# Altium PCB 辉光钟第二版.PcbDoc
Units mil, origin at the board's own origin, x right, y up, seen from the top; angles counter-clockwise.
Board outline 7543.7 x 2468.7 mil, 2 copper layers (Top Layer, Bottom Layer); 50 components, 122 nets, 373 pads, 139 vias.
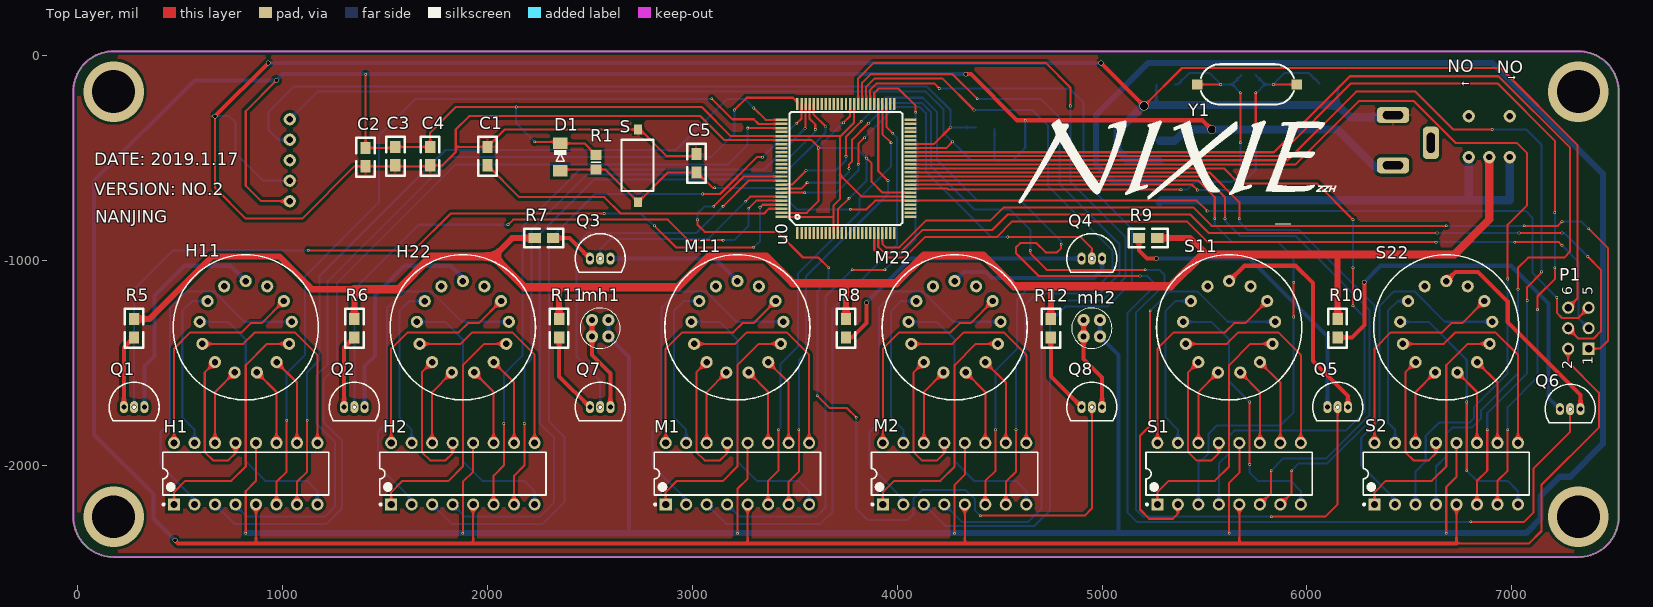
[diagram p0: Top Layer view]
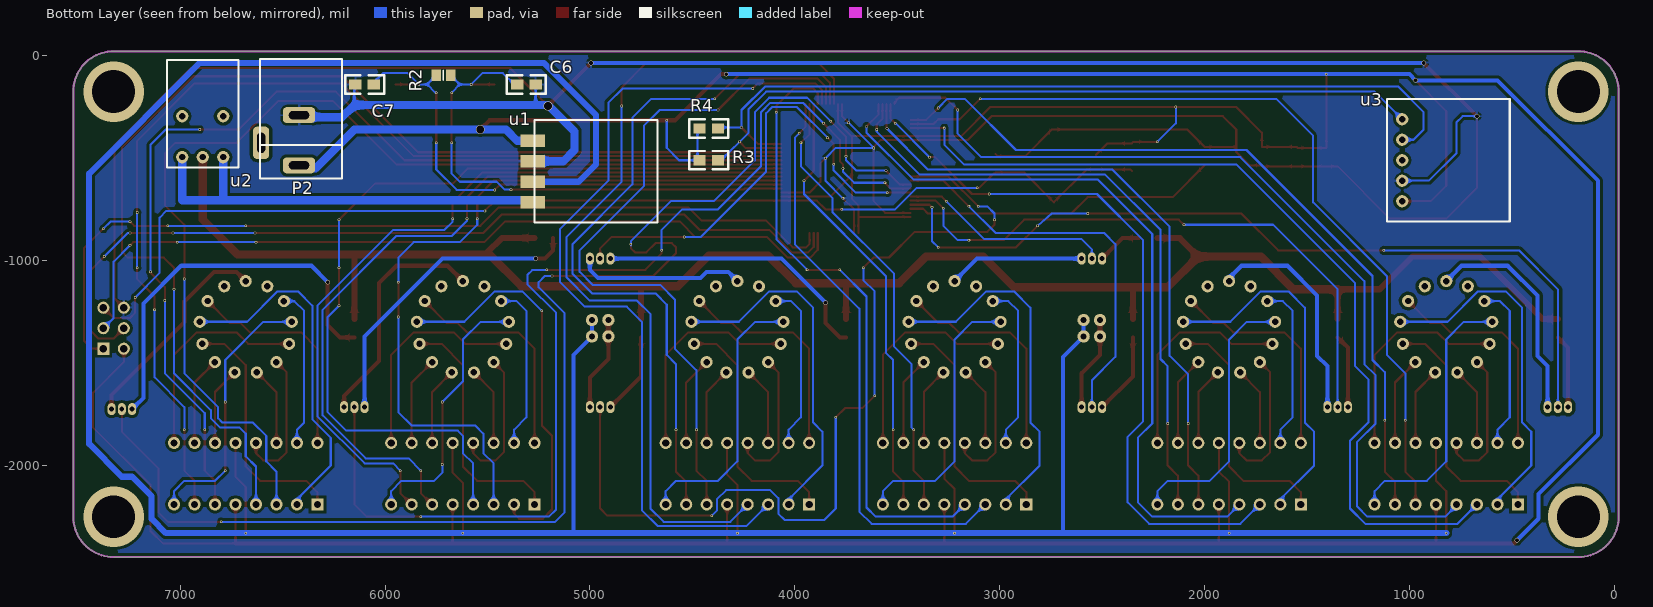
[diagram p1: Bottom Layer view, seen from below]

## Layer stack, top to bottom
Top Solder: solder mask 0.4, Solder Resist, Dk 3.5
Top Layer: signal copper 1.4
Dielectric 1: dielectric 12.6, FR-4, Dk 4.8
Bottom Layer: signal copper 1.4
Bottom Solder: solder mask 0.4, Solder Resist, Dk 3.5

## Board outline
175,-2446.85 cw(c175,-2250) -21.85,-2250 -21.85,-175 cw(c175,-175) 175,21.85 7325,21.85 cw(c7325,-175) 7521.85,-175 7521.85,-2250 cw(c7325,-2250) 7325,-2446.85

## Design rules (kind name [scope] priority, off if disabled: settings)
Clearance [inpolygon] p1: gap=15
PolygonConnect [All] p1: connectstyle=Relief reliefconductorwidth=10 reliefentries=4 polygonreliefangle="90 Angle" airgapwidth=10
RoutingVias [All] p1: holewidth=28 width=20 viastyle="Through Hole" minholewidth=10 minwidth=10 maxholewidth=28 maxwidth=50
SolderMaskExpansion [All] p1: expansion=4
UnpouredPolygon [All] p1: allowunpoured=FALSE
Width [All] p1: maxlimit=40 minlimit=10 preferedwidth=10
29 further rules are at their usual default settings.

## Components (designator, comment, footprint, x,y, rotation, side; value= is the part's Value field where it differs from the comment)
C1 "100nf" 0805#1 2000,-445 r270 top
C2 "100nf" 0805#1 1405,-540 r90 top
C3 "100nf" 0805#1 1550,-535 r90 top
C4 "100nf" 0805#1 1720,-535 r90 top
C5 "22p" 0805#1 3020,-480 r270 top
C6 "18p" 0805#1 5265,-140 r0 bottom
C7 "18p" 0805#1 6145,-140 r180 bottom
D1 "CD1206-S01575" MINIMELF 2355,-495 r270 top
H1 "K155ID1" DIP-16 820,-2040 r90 top
H2 "K155ID1" DIP-16 1880,-2040 r90 top
H11 "IN-14" IN-14 820,-1325 r0 top
H22 "IN-14" IN-14 1880,-1325 r0 top
M1 "K155ID1" DIP-16 3220,-2040 r90 top
M2 "K155ID1" DIP-16 4280,-2040 r90 top
M11 "IN-14" IN-14 3220,-1325 r0 top
M22 "IN-14" IN-14 4280,-1325 r0 top
mh1 "maohao" PCBComponent_1#1 2550,-1330 r0 top
mh2 "maohao" PCBComponent_1#1 4950,-1330 r0 top
P1 "ISCP" HDR2X3 7375,-1430 r90 top
P2 "电源" DC5.5-2.1 6420,-290 r270 bottom
Q1 "NPN三极管" TO-92 275,-1715 r180 top
Q2 "NPN三极管" TO-92 1350,-1715 r180 top
Q3 "NPN三极管" TO-92 2550,-990 r180 top
Q4 "NPN三极管" TO-92 4950,-990 r180 top
Q5 "NPN三极管" TO-92 6150,-1715 r180 top
Q6 "NPN三极管" TO-92 7285,-1725 r180 top
Q7 "NPN三极管" TO-92 2550,-1715 r180 top
Q8 "NPN三极管" TO-92 4950,-1715 r180 top
R1 "10K" 0805#2 2530,-520 r90 top
R2 "1M" 0805#2 5715,-95 r180 bottom
R3 "10K" 0805#1 4375,-510 r0 bottom
R4 "10K" 0805#1 4375,-355 r0 bottom
R5 "20K" 0805#1 275,-1285 r270 top
R6 "20K" 0805#1 1350,-1285 r270 top
R7 "20K" 0805#1 2230,-890 r0 top
R8 "20K" 0805#1 3750,-1285 r270 top
R9 "20K" 0805#1 5270,-890 r180 top
R10 "20K" 0805#1 6150,-1285 r270 top
R11 "200K" 0805#1 2350,-1285 r270 top
R12 "200K" 0805#1 4750,-1285 r270 top
S "SWITCH" SWITCH 2735,-360 r270 top
S1 "K155ID1" DIP-16 5620,-2040 r90 top
S2 "K155ID1" DIP-16 6680,-2040 r90 top
S11 "IN-14" IN-14 5620,-1325 r0 top
S22 "IN-14" IN-14 6680,-1325 r0 top
u0 "ATMEGA2560-16AU" TQFP100 3750,-550 r90 top
u1 "5V-160V升压模块" PCBComponent_1#2 4670,-315 r90 bottom
u2 "kaiguan" PCBComponent_1#3 6890,-395 r0 bottom
u3 "clock" PCBComponent_1#4 810,-485 r180 bottom
Y1 "16MHz" XTAL_US 5805,-140 r180 top

## Footprints (in the part's own frame and the unit in brackets; to place one, negate y for a bottom-side part, rotate by r counter-clockwise, add the part's x,y. Pads: shape width x height; smd on the part's side, far side on the other; paste and mask are expansions set on the pad)
0805#1 [mil]
  rect 60x50 smd: 1(0,-0.06) 2(90,-0.06)
  silkscreen extent -50,-45 140,45
0805#2 [mil]
  rect 47.24x55.12 smd: 1(-35.43,0) 2(35.43,0)
  silkscreen extent 0,-24 0,24, body extent -42,-28 42,28, height 28
DC5.5-2.1 [mm]
  rrect50% 2x4 hole 1 slot 2.5 at 90 deg: 1(0,0) 3(6.223,0)
  rrect50% 4x2 hole 1 slot 2.5 at 0 deg: 2(3.429,-4.699)
DIP-16 [mm] "DIP; 16 Leads; Row Spacing 7.62 mm; Pitch 2.54 mm"
  rect 1.5x1.5 hole 0.9: 1(-3.81,8.89)
  round 1.5 hole 0.9: 2(-3.81,6.35) 3(-3.81,3.81) 4(-3.81,1.27) 5(-3.81,-1.27) 6(-3.81,-3.81) 7(-3.81,-6.35) 8(-3.81,-8.89) 9(3.81,-8.89) 10(3.81,-6.35) 11(3.81,-3.81) 12(3.81,-1.27) 13(3.81,1.27) 14(3.81,3.81) 15(3.81,6.35) 16(3.81,8.89)
  silkscreen extent -3.93,-10.3 2.65,10.31, body extent -3.6,-10.28 3.6,10.28, height 5.08
HDR2X3 [mm] "Connector; Header; 3x2 Position"
  rect 1.5x1.5 hole 0.9: 1(0,0)
  round 1.5 hole 0.9: 2(0,2.54) 3(2.54,0) 4(2.54,2.54) 5(5.08,0) 6(5.08,2.54)
IN-14 [mm]
  round 1.5 hole 0.8: 0(4.727,3.248) 1(-4.733,3.239) 2(-5.708,0.665) 3(-5.375,-2.068) 4(-3.81,-4.332) 5(-1.372,-5.61) 6(1.381,-5.607) 7(3.818,-4.326) 8(5.379,-2.058) 9(5.707,0.675) 11(0,5.724) L0(2.664,5.07) R0(-2.673,5.065)
  silkscreen extent -9,-9.03 9,8.97
MINIMELF [mil]
  rect 56x71 smd: A(67,0) C(-66.93,0)
  silkscreen extent -34,-31 20,31
PCBComponent_1#1 [mil]
  round 60 hole 30: 1(-40,40) 2(40,40) 3(-40,-40) 4(40,-40)
  silkscreen extent -98,-98 98,98
PCBComponent_1#2 [mil]
  rect 62.99x120 smd: 1(-100,610) 2(-200,610) 3(-300,610) 4(-400,610)
  silkscreen extent -500,0 3,600
PCBComponent_1#3 [mil]
  round 60 hole 30: 1(-100,100) 2(0,100) 3(100,100) 4(-100,-100) 5(100,-100)
  silkscreen extent -175,-375 175,150
PCBComponent_1#4 [mil]
  round 60 hole 30: 1(-225,-225) 2(-225,-125) 3(-225,-25) 4(-225,75) 5(-225,175)
  silkscreen extent -300,-325 300,275
SWITCH [mm]
  rect 1.2x1 smd: 1(0,0) 2(9.017,0)
  silkscreen extent 1.27,-2.03 7.62,1.91
TO-92 [mm]
  oval 1x1.5 hole 0.6: 1(1.27,0) 2(0,0) 3(-1.27,0)
  silkscreen extent -3.1,-3.1 3.1,1.7, body extent -3.08,-3.13 3.12,1.68, height 10.31
TQFP100 [mil]
  rect 60x12 smd: 1(-314.96,237) 2(-314.96,217) 3(-314.96,197) 4(-314.96,178) 5(-314.96,158) 6(-314.96,138) 7(-314.96,119) 8(-314.96,99) 9(-314.96,79) 10(-314.96,60) 11(-314.96,40) 12(-314.96,20) 13(-314.96,0) 14(-314.96,-19.69) 15(-314.96,-39.37) 16(-314.96,-59.06) 17(-314.96,-78.74) 18(-314.96,-98.43) 19(-314.96,-118.11) 20(-314.96,-137.8) 21(-314.96,-157.48) 22(-314.96,-177.17) 23(-314.96,-196.85) 24(-314.96,-216.54) 25(-314.96,-236.22) 51(315,-236.22) 52(315,-216.54) 53(315,-196.85) 54(315,-177.17) 55(315,-157.48) 56(315,-137.8) 57(315,-118.11) 58(315,-98.43) 59(315,-78.74) 60(315,-59.06) 61(315,-39.37) 62(315,-19.69) 63(315,0) 64(315,20) 65(315,40) 66(315,60) 67(315,79) 68(315,99) 69(315,119) 70(315,138) 71(315,158) 72(315,178) 73(315,197) 74(315,217) 75(315,237)
  rect 12x60 smd: 26(-236.22,-314.96) 27(-216.54,-314.96) 28(-196.85,-314.96) 29(-177.17,-314.96) 30(-157.48,-314.96) 31(-137.8,-314.96) 32(-118.11,-314.96) 33(-98.43,-314.96) 34(-78.74,-314.96) 35(-59.06,-314.96) 36(-39.37,-314.96) 37(-19.68,-314.96) 38(0,-314.96) 39(20,-314.96) 40(40,-314.96) 41(60,-314.96) 42(79,-314.96) 43(99,-314.96) 44(119,-314.96) 45(138,-314.96) 46(158,-314.96) 47(178,-314.96) 48(197,-314.96) 49(217,-314.96) 50(237,-314.96) 76(237,315) 77(217,315) 78(197,315) 79(178,315) 80(158,315) 81(138,315) 82(119,315) 83(99,315) 84(79,315) 85(60,315) 86(40,315) 87(20,315) 88(0,315) 89(-19.68,315) 90(-39.37,315) 91(-59.06,315) 92(-78.74,315) 93(-98.43,315) 94(-118.11,315) 95(-137.8,315) 96(-157.48,315) 97(-177.17,315) 98(-196.85,315) 99(-216.54,315) 100(-236.22,315)
  silkscreen extent -276,-276 276,276
XTAL_US [mil]
  rect 50x50 smd: 1(-145,0) 2(340,0)
  silkscreen extent -131,-98 323,98

## Part data
C1 C2 C3 C4: library part C
C5: library part C_3
C6 C7: library part C_1
D1: library part DIODE-MINIMELF, "<b>DIODE</b>"
P1: library part "Header 3X2", "Header, 3-Pin, Dual row"
P2: library part dc5.5-2.1
Q1 Q2 Q3 Q4 Q5 Q6 Q7 Q8: library part NPN三极管_1, "NPN"
R1 R2: library part RES
R3 R4 R5 R6 R7 R8 R9 R10 R11 R12: library part R
u0: library part ATMEGA2560AU, "<b>MICROCONTROLLER</b><p> / 64/128/256 Kbytes FLASH<p> / 4 Kbytes EEPROM<p> / 8 Kbytes SRAM<p> / 86 General Purpose I/O pins<p> / 12-channels16-bit PWM<p> / 4 x Serial USARTs<p> / 16-channels 10-bit A/D<p>"
u1: library part 5-160
Y1: library part XTAL, "Crystal Oscillator"

## Via types
v1: diameter 13, hole 8, Top Layer to Bottom Layer, 124 vias
v2: diameter 23, hole 18, Top Layer to Bottom Layer, 9 vias
v3: diameter 295.28, hole 208.66, Top Layer to Bottom Layer, 4 vias
v4: diameter 43, hole 38, Top Layer to Bottom Layer, 2 vias

## Nets (pads, with @x,y where several pads share a name; then routed paths per layer and width w, separated by ;. In a path a pad name is that pad's centre, name@x,y a point inside that pad or via, vN(x,y) a via of type N, cw(c..) or ccw(c..) an arc to the next point about the centre after c; other vN are vias at no path point)
160V: u1.4 u2.1 u2.3 | length 2109.1
  Bottom Layer w40: u1.4 5290,-705 6790,-705 ; u2.1@6790,-520 6790,-705 ; u2.3 6990,-705 6790,-705
AREF: C1.2 u0.98 | length 1542
  Top Layer w10: C1.2 2154.94,-690 2570,-690 2650,-770 3350,-770 3373.15,-746.85 u0.98
GND: C1.1 C2.1 C3.1 C4.1 C5.1 C6.1 C7.1 P1.6 P2.1 S.1 u0.11 u0.32 u0.62 u0.81 u0.99 u1.2 u3.2 | length 17059.6
  Top Layer w10: v2(670,-295) 670,-645 820,-795 1095,-795 1350,-540 C2.1 C4.1@1715.07,-540 ; C4.1 1780,-535 1845,-470 1845,-360 1910,-295 3040,-295 3157,-412 u0.81 3582,-412 3615,-445 3615,-710 3558.46,-766.54 u0.99 ; 1845,-445 C1.1 2084.94,-360 S.1 2745,-360 2875,-490 3009.94,-490 C5.1 ; u0.11 3710,-750 v1(3765,-695) ; v1(3737.5,-327.5) 3769.69,-295.32 u0.62 ; v1(3850,-500) 3875,-525 3875,-615 3928.11,-668.11 u0.32 ; v4(5205,-245) 5390,-60 6945,-60 7320,-435 7320,-1185 P1.6
  Top Layer w20: v2(670,-295) v2(930,-35) ; v2(4995,-35) v4(5205,-245)
  Bottom Layer w10: v2(670,-295) 740,-295 770,-325 770,-475 905,-610 u3.2 ; v1(3737.5,-327.5) v1(3615,-450) 3800,-450 v1(3850,-500) 3850,-610 v1(3765,-695) ; 5260,-240 5265,-240 C6.1 ; 6150,-240 6150,-155.06 C7.1@6160,-145.06
  Bottom Layer w20: v2(930,-35) v2(4995,-35)
  Bottom Layer w40: 5260,-240 5205,-240 5075,-370 5075,-460 5130,-515 u1.2 ; 5265,-240 6150,-240 6210,-300 P2.1@6350,-300
GNDH: H1.12 H2.12 M1.12 M2.12 mh1.2 mh1.4 mh2.2 mh2.4 S1.12 S2.12 u1.3 | length 16509.2
  Top Layer w10: v1(820,-2330) 820,-2125 870,-2075 H1.12 ; v1(1880,-2330) 1880,-2080 1930,-2030 H2.12 ; v1(3220,-2330) 3220,-2115 3270,-2065 M1.12 ; v1(4280,-2330) 4280,-2095 4330,-2045 M2.12 ; v1(5620,-2330) 5620,-2085 5670,-2035 S1.12 ; v1(6680,-2330) 6680,-2105 6730,-2055 S2.12
  Bottom Layer w10: 6155,-35 6160,-40
  Bottom Layer w20: mh1.2 mh1.4 2690,-1470 2690,-2330 ; mh2.2 mh2.4 5080,-1460 5080,-2330
  Bottom Layer w30: v1(820,-2330) 7070,-2330 7140,-2260 7140,-2150 7235,-2055 7285,-2055 7445,-1895 7445,-575 6905,-35 6155,-35 5225,-35 4970,-290 4970,-530 5055,-615 u1.3
H1-0: H1.16 H11.0 | length 1092.6
  Top Layer w10: H1.16 470,-1430 550,-1350 800,-1350 845,-1305 898.26,-1305 H11.0
H1-1: H1.15 H11.1 | length 813.2
  Bottom Layer w10: H1.15 570,-1825 510,-1765 510,-1245 557.53,-1197.47 H11.1
H1-2: H1.8 H11.2 | length 1330.5
  Bottom Layer w10: H11.2 733.82,-1298.82 820,-1385 820,-1980 915,-2075 1120,-2075 1170,-2125 H1.8
H1-3: H1.9 H11.3 | length 1060.5
  Top Layer w10: H11.3 808.59,-1406.41 865,-1350 1060,-1350 1170,-1460 H1.9
H1-4: H1.13 H11.4 | length 691.2
  Top Layer w10: H11.4 620,-1545.56 620,-1935 660,-1975 735,-1975 770,-1940 H1.13
H1-5: H1.14 H11.5 | length 383.9
  Top Layer w10: H1.14 670,-1641.86 H11.5
H1-6: H1.11 H11.6 | length 383.8
  Top Layer w10: H11.6 970,-1641.38 H1.11
H1-7: H1.10 H11.7 | length 436
  Top Layer w10: H11.7 1070,-1595 H1.10
H1-8: H1.1 H11.8 | length 1211.6
  Top Layer w10: H1.1 470,-2130 525,-2075 750,-2075 820,-2005 820,-1510 923.97,-1406.04 H11.8
H1-9: H1.2 H11.9 | length 1736.3
  Bottom Layer w10: H1.2 570,-2165 405,-2000 405,-1835 450,-1790 450,-1230 530,-1150 665,-1150 813.43,-1298.43 H11.9
H1-A: H1.3 u0.78 | length 4386.2
  Top Layer w10: v1(3270,-353) u0.78
  Bottom Layer w10: H1.3 765,-2285 1215,-2285 1290,-2210 1290,-1880 1200,-1790 1200,-1580 1265,-1515 1265,-1110 1845,-530 3175,-530 3270,-435 v1(3270,-353)
H1-B: H1.6 u0.77 | length 4097.6
  Top Layer w10: H1.6 970,-2080 1020,-2030 v1(1020,-1780) ; v1(3095,-210) 3195,-310 3300,-310 3323,-333 u0.77
  Bottom Layer w10: v1(1020,-1780) 1020,-1550 1110,-1460 1110,-1075 1470,-715 1470,-390 1650,-210 v1(3095,-210)
H1-C: H1.7 u0.76 | length 3816.5
  Top Layer w10: H1.7 1070,-2080 1120,-2030 v1(1120,-1780) ; v1(3300,-255) 3358,-313 u0.76
  Bottom Layer w10: v1(1120,-1780) 1120,-1545 1180,-1485 1180,-1075 1795,-460 2920,-460 3170,-210 3255,-210 v1(3300,-255)
H1-D: H1.4 u0.75 | length 4441.8
  Top Layer w10: v1(3205,-265) 3265,-205 3491,-205 3513,-227 u0.75
  Bottom Layer w10: H1.4 770,-2195 825,-2250 1205,-2250 1255,-2200 1255,-1885 1165,-1795 1165,-1560 1220,-1505 1220,-1100 1825,-495 3090,-495 3205,-380 v1(3205,-265)
H2-0: H2.16 H22.0 | length 1092.6
  Top Layer w10: H2.16 1530,-1430 1610,-1350 1860,-1350 1905,-1305 1958.26,-1305 H22.0
H2-1: H2.15 H22.1 | length 813.2
  Bottom Layer w10: H2.15 1630,-1825 1570,-1765 1570,-1245 1617.53,-1197.47 H22.1
H2-2: H2.8 H22.2 | length 1330.5
  Bottom Layer w10: H22.2 1793.82,-1298.82 1880,-1385 1880,-1980 1975,-2075 2180,-2075 2230,-2125 H2.8
H2-3: H2.9 H22.3 | length 1060.5
  Top Layer w10: H22.3 1868.6,-1406.41 1925,-1350 2120,-1350 2230,-1460 H2.9
H2-4: H2.13 H22.4 | length 691.2
  Top Layer w10: H22.4 1680,-1545.56 1680,-1935 1720,-1975 1795,-1975 1830,-1940 H2.13
H2-5: H2.14 H22.5 | length 383.9
  Top Layer w10: H2.14 1730,-1641.86 H22.5
H2-6: H2.11 H22.6 | length 383.8
  Top Layer w10: H22.6 2030,-1641.38 H2.11
H2-7: H2.10 H22.7 | length 436
  Top Layer w10: H22.7 2130,-1595 H2.10
H2-8: H2.1 H22.8 | length 1211.6
  Top Layer w10: H2.1 1530,-2130 1585,-2075 1810,-2075 1880,-2005 1880,-1510 1983.97,-1406.04 H22.8
H2-9: H2.2 H22.9 | length 1711.3
  Bottom Layer w10: H2.2@1630,-2165 1465,-2000 1465,-1835 1510,-1790 1510,-1230 1590,-1150 1725,-1150 1873.43,-1298.43 H22.9
H2-A: H2.3 u0.74 | length 3589.5
  Top Layer w10: v1(3050,-675) 3135,-675 3315,-495 v1(3342.5,-495) ; v1(3510,-330) 3533,-307 u0.74
  Bottom Layer w10: H2.3 1825,-2285 2270,-2285 2375,-2180 2375,-1860 2300,-1785 2300,-900 2525,-675 v1(3050,-675) ; v1(3342.5,-495) 3507.5,-330 v1(3510,-330)
H2-B: H2.6 u0.73 | length 3108.8
  Top Layer w10: H2.6 2030,-2050 2080,-2000 v1(2080,-1795) ; v1@3553,-352 u0.73
  Bottom Layer w10: v1(2080,-1795) 2080,-1555 2170,-1465 2170,-835 2450,-555 3350,-555 v1(3550,-355)
H2-C: H2.7 u0.72 | length 3105.6
  Top Layer w10: H2.7 2130,-2050 2180,-2000 v1(2180,-1795) ; u0.72 3572,-307 3600,-335 v1(3600,-360)
  Bottom Layer w10: v1(2180,-1795) 2180,-1515 2215,-1480 2215,-850 2485,-580 3390,-580 3600,-370 v1(3600,-360)
H2-D: H2.4 u0.71 | length 3651.9
  Top Layer w10: u0.71 3592,-287 v1(3650,-345)
  Bottom Layer w10: H2.4 1890,-2250 2255,-2250 2325,-2180 2325,-1865 2255,-1795 2255,-870 2520,-605 3420,-605 3650,-375 v1(3650,-345)
KH1: Q1.2 u0.97 | length 4136.7
  Top Layer w10: v1(1125,-950) 1640,-950 1820,-770 v1(2570,-770) ; v1(2815,-830) 2920,-935 v1(3300,-935) ; v1(3330,-740) 3342.83,-727.17 u0.97
  Bottom Layer w10: Q1.2 275,-1140 465,-950 v1(1125,-950) ; v1(2570,-770) 2745,-770 v1(2815,-830) ; v1(3300,-935) 3330,-905 v1(3330,-740)
KH2: Q2.2 u0.96 | length 2971.8
  Top Layer w10: v1(2100,-825) 2125,-800 2880,-800 2980,-900 v1(3150,-900) ; v1(3275,-745) 3312.52,-707.48 u0.96
  Bottom Layer w10: Q2.2 1350,-1140 1665,-825 v1(2100,-825) ; v1(3150,-900) 3205,-900 3275,-830 v1(3275,-745)
KM1: Q3.2 u0.95 | length 1036.5
  Top Layer w10: v1(3260,-710) 3282.2,-687.8 u0.95
  Bottom Layer w10: Q3.2 2550,-945 2600,-895 3075,-895 v1(3260,-710)
KM2: Q4.2 u0.94 | length 2267.1
  Top Layer w10: u0.94 v1(3548.11,-668.11) ; v1(3810,-530) 3810,-430 v1(3840,-400) ; v1(4540,-885) 4895,-885 4950,-940 Q4.2
  Bottom Layer w10: v1(3548.11,-668.11) 3701.89,-668.11 3810,-560 v1(3810,-530) ; v1(3840,-400) 3990,-250 4110,-250 4140,-280 4140,-565 4460,-885 v1(4540,-885)
KMH1: Q7.2 u0.91 | length 1971.4
  Top Layer w10: v1(3150,-735) 3275.94,-609.06 u0.91
  Bottom Layer w10: Q7.2 2550,-1585 2435,-1470 2435,-920 2490,-865 3020,-865 v1(3150,-735)
KMH2: Q8.2 u0.90 | length 4463.3
  Top Layer w10: v1(3025,-800) 3025,-825 3060,-860 3415,-860 3540,-985 3615,-985 v1(3665,-1035) ; v1(3105,-735) 3250.63,-589.37 u0.90 ; v1(3610,-1660) 3670,-1720 3755,-1720 v1(3800,-1765) ; v1(4405,-2245) 4915,-2245 4950,-2210 Q8.2
  Bottom Layer w10: v1(3025,-800) 3025,-770 3060,-735 v1(3105,-735) ; v1(3610,-1660) 3610,-1150 3665,-1095 v1(3665,-1035) ; v1(3800,-1765) 3800,-2210 3855,-2265 4050,-2265 4080,-2235 4080,-2160 4120,-2120 4335,-2120 4380,-2165 4380,-2220 v1(4405,-2245)
KS1: Q5.2 u0.93 | length 5395.8
  Top Layer w10: u0.93 3531.57,-648.43 v1(3560,-620) ; v1(3765,-550) 3765,-530 3780,-515 3780,-410 v1(3860,-330) ; v1(4650,-950) 4650,-965 4730,-1045 v1(5210,-1045) ; v1(5825,-2250) 6090,-2250 6150,-2190 Q5.2
  Bottom Layer w10: v1(3560,-620) 3710,-620 3765,-565 v1(3765,-550) ; v1(3860,-330) 3960,-230 4120,-230 4165,-275 4165,-540 4375,-750 4550,-750 4650,-850 v1(4650,-950) ; v1(5210,-1045) 5280,-1045 ; 5281.67,-1046.67 5305,-1070 5305,-1115 5165,-1255 5165,-2215 5200,-2250 v1(5825,-2250)
KS2: Q6.2 u0.92 | length 6862.3
  Top Layer w10: u0.92 3486.26,-628.74 v1(3555,-560) ; v1(3750,-490) 3750,-395 v1(3825,-320) ; v1(4800,-920) 4800,-940 4780,-960 4725,-960 4680,-915 4600,-915 4580,-935 4580,-965 4690,-1075 v1(5185,-1075) ; v1(6800,-2275) 7060,-2275 7105,-2230 7105,-2015 7285,-1835 Q6.2
  Bottom Layer w10: v1(3555,-560) 3700,-560 3750,-510 v1(3750,-490) ; v1(3825,-320) 3940,-205 4125,-205 4195,-275 4195,-510 4395,-710 4605,-710 4800,-905 v1@4800,-925 ; v1(5185,-1075) 5220,-1075 5250,-1105 5250,-1130 5125,-1255 5125,-2230 5170,-2275 v1(6800,-2275)
M1-0: M1.16 M11.0 | length 1092.6
  Top Layer w10: M1.16 2870,-1430 2950,-1350 3200,-1350 3245,-1305 3298.26,-1305 M11.0
M1-1: M1.15 M11.1 | length 813.2
  Bottom Layer w10: M1.15 2970,-1825 2910,-1765 2910,-1245 2957.53,-1197.47 M11.1
M1-2: M1.8 M11.2 | length 1330.5
  Bottom Layer w10: M11.2 3133.82,-1298.82 3220,-1385 3220,-1980 3315,-2075 3520,-2075 3570,-2125 M1.8
M1-3: M1.9 M11.3 | length 1060.5
  Top Layer w10: M11.3 3208.6,-1406.41 3265,-1350 3460,-1350 3570,-1460 M1.9
M1-4: M1.13 M11.4 | length 691.2
  Top Layer w10: M11.4 3020,-1545.56 3020,-1935 3060,-1975 3135,-1975 3170,-1940 M1.13
M1-5: M1.14 M11.5 | length 383.9
  Top Layer w10: M1.14 3070,-1641.86 M11.5
M1-6: M1.11 M11.6 | length 383.8
  Top Layer w10: M11.6 3370,-1641.38 M1.11
M1-7: M1.10 M11.7 | length 436
  Top Layer w10: M11.7 3470,-1595 M1.10
M1-8: M1.1 M11.8 | length 1211.6
  Top Layer w10: M1.1 2870,-2130 2925,-2075 3150,-2075 3220,-2005 3220,-1510 3323.97,-1406.04 M11.8
M1-9: M1.2 M11.9 | length 1711.3
  Bottom Layer w10: M1.2@2970,-2165 2805,-2000 2805,-1835 2850,-1790 2850,-1230 2930,-1150 3065,-1150 3213.43,-1298.43 M11.9
M1-A: M1.3 u0.53 | length 2821.7
  Top Layer w10: u0.53 3946.85,-346.85 v1(3977.5,-377.5)
  Bottom Layer w10: M1.3 3165,-2285 3625,-2285 3685,-2225 3685,-1235 4000,-920 4000,-400 v1(3977.5,-377.5)
M1-B: M1.6 u0.54 | length 2221.3
  Top Layer w10: M1.6 3370,-2075 3420,-2025 v1(3420,-1825) ; u0.54 3927.17,-382.17 v1(3970,-425)
  Bottom Layer w10: v1(3420,-1825) 3430,-1815 3430,-1505 3515,-1420 3515,-1065 3815,-765 3815,-695 3970,-540 v1(3970,-425)
M1-C: M1.7 u0.55 | length 2175.6
  Top Layer w10: M1.7 3470,-2080 3520,-2030 v1(3520,-1825) ; u0.55 3907.48,-562.48 v1(3955,-610)
  Bottom Layer w10: v1(3520,-1825) 3520,-1485 3555,-1450 3555,-1075 3955,-675 v1(3955,-610)
M1-D: M1.4 u0.56 | length 3058.9
  Top Layer w10: v1(3780,-1045) v1(3940,-1045) ; u0.56 3887.8,-182.21 3910,-160 4005,-160 4090,-245 v1(4090,-275)
  Bottom Layer w10: M1.4 3230,-2250 3605,-2250 3650,-2205 3650,-1175 v1(3780,-1045) ; v1(3940,-1045) 4090,-895 v1(4090,-275)
M2-0: M2.16 M22.0 | length 1092.6
  Top Layer w10: M2.16 3930,-1430 4010,-1350 4260,-1350 4305,-1305 4358.26,-1305 M22.0
M2-1: M2.15 M22.1 | length 813.2
  Bottom Layer w10: M2.15 4030,-1825 3970,-1765 3970,-1245 4017.53,-1197.47 M22.1
M2-2: M2.8 M22.2 | length 1330.5
  Bottom Layer w10: M22.2 4193.82,-1298.82 4280,-1385 4280,-1980 4375,-2075 4580,-2075 4630,-2125 M2.8
M2-3: M2.9 M22.3 | length 1060.5
  Top Layer w10: M22.3 4268.6,-1406.41 4325,-1350 4520,-1350 4630,-1460 M2.9
M2-4: M2.13 M22.4 | length 691.2
  Top Layer w10: M22.4 4080,-1545.56 4080,-1935 4120,-1975 4195,-1975 4230,-1940 M2.13
M2-5: M2.14 M22.5 | length 383.9
  Top Layer w10: M2.14 4130,-1641.86 M22.5
M2-6: M2.11 M22.6 | length 383.8
  Top Layer w10: M22.6 4430,-1641.38 M2.11
M2-7: M2.10 M22.7 | length 436
  Top Layer w10: M22.7 4530,-1595 M2.10
M2-8: M2.1 M22.8 | length 1211.6
  Top Layer w10: M2.1 3930,-2130 3985,-2075 4210,-2075 4280,-2005 4280,-1510 4383.97,-1406.04 M22.8
M2-9: M2.2 M22.9 | length 1711.3
  Bottom Layer w10: M2.2@4030,-2165 3865,-2000 3865,-1835 3910,-1790 3910,-1230 3990,-1150 4125,-1150 4273.43,-1298.43 M22.9
M2-A: M2.3 u0.57 | length 4225.2
  Top Layer w10: u0.57 3868.11,-166.89 3900,-135 4180,-135 v1(4205,-160)
  Bottom Layer w10: M2.3 4235,-2295 4670,-2295 4745,-2220 4745,-1300 4820,-1225 5025,-1225 5145,-1105 5145,-845 4910,-610 4910,-230 4840,-160 v1(4205,-160)
M2-B: M2.6 u0.58 | length 3513.1
  Top Layer w10: u0.58 3848.43,-151.58 3890,-110 4220,-110 v1(4375,-265) ; M2.6 4430,-2075 4480,-2025 v1(4480,-1825)
  Bottom Layer w10: v1(4375,-265) 4660,-265 4735,-340 4735,-635 5050,-950 5050,-1055 4985,-1120 4655,-1120 4585,-1190 4585,-1430 4480,-1535 v1(4480,-1825)
M2-C: M2.7 u0.59 | length 3592.8
  Top Layer w10: u0.59 3828.74,-131.26 3870,-90 4270,-90 v1(4390,-210) ; M2.7 4530,-2080 4580,-2030 v1(4580,-1825)
  Bottom Layer w10: v1(4390,-210) 4700,-210 4792.5,-302.5 4792.5,-627.5 5085,-920 5085,-1065 4990,-1160 4680,-1160 4625,-1215 4625,-1460 4580,-1505 v1(4580,-1825)
M2-D: M2.4 u0.60 | length 4249.7
  Top Layer w10: u0.60 3809.06,-110.95 3885,-35 4725,-35 4845,-155 v1(4845,-245)
  Bottom Layer w10: M2.4 4315,-2275 4640,-2275 4705,-2210 4705,-1260 4770,-1195 5000,-1195 5115,-1080 5115,-885 4845,-615 v1(4845,-245)
NetH11_11: H11.11 Q1.3 | length 1101.7
  Bottom Layer w20: Q1.3 325,-1515 375,-1465 375,-1170 520,-1025 745.36,-1025 H11.11
NetH22_11: H22.11 Q2.3 | length 1101.7
  Bottom Layer w20: Q2.3 1400,-1515 1450,-1465 1450,-1170 1595,-1025 1820.36,-1025 H22.11@1895,-1099.64
NetM11_11: M11.11 Q3.3 | length 665.4
  Bottom Layer w20: Q3.3 3110.36,-990 M11.11
NetM22_11: M22.11 Q4.3 | length 822.5
  Bottom Layer w20: M22.11 4324.64,-1055 4430,-1055 4460,-1085 4960,-1085 5000,-1045 Q4.3
Netmh1_1: mh1.1 mh1.3 Q7.3 | length 462.3
  Top Layer w20: mh1.1 mh1.3 2510,-1460 2600,-1550 Q7.3
Netmh2_1: mh2.1 mh2.3 Q8.3 | length 462.3
  Top Layer w20: mh2.1 mh2.3 4910,-1480 5000,-1570 Q8.3
NetQ1_1: Q1.1 R5.2 | length 360.7
  Top Layer w20: Q1.1 225,-1424.94 R5.2
NetQ2_1: Q2.1 R6.2 | length 360.7
  Top Layer w20: Q2.1 1300,-1424.94 R6.2
NetQ3_1: Q3.1 R7.2 | length 221.4
  Top Layer w20: R7.2 2400.06,-890.07 Q3.1
NetQ4_1: Q4.1 R8.2 | length 1368.1
  Top Layer w20: R8.2 3780,-1375 3850,-1305 v2(3850,-1205)
  Bottom Layer w20: v2(3850,-1205) 4065,-990 Q4.1
NetQ5_1: Q5.1 R9.2 | length 1499
  Top Layer w20: R9.2 5180,-950 5220,-990 v2(5265,-990)
  Bottom Layer w20: v2(5265,-990) 5720,-990 6100,-1370 Q5.1
NetQ5_3: Q5.3 S11.11 | length 1151.5
  Top Layer w20: S11.11 5694.64,-1025 5945,-1025 6030,-1110 6030,-1490 6200,-1660 Q5.3
NetQ6_1: Q6.1 R10.2 | length 1912.5
  Top Layer w20: R10.2 6220,-1375 6280,-1315 v2(6280,-1105)
  Bottom Layer w20: v2(6280,-1105) 6360,-1025 6995,-1025 7180,-1210 7180,-1670 Q6.1
NetQ6_3: Q6.3 S22.11 | length 1050.6
  Top Layer w20: S22.11 6724.64,-1055 6835,-1055 6980,-1200 6980,-1300 7335,-1655 Q6.3
NetQ7_1: Q7.1 R11.2 | length 402.2
  Top Layer w20: R11.2 2349.94,-1564.94 Q7.1
NetQ8_1: Q8.1 R12.2 | length 402.2
  Top Layer w20: R12.2 4749.94,-1564.94 Q8.1
PB1: P1.3 u0.20 | length 4034.4
  Top Layer w10: u0.20 3887.8,-947.8 3925,-985 4035,-985 4135,-885 4485,-885 4560,-810 5415,-810 5515,-910 v1(6630,-910) ; v1(7015,-910) 7230,-910 v1(7245,-925)
  Bottom Layer w10: v1(6630,-910) v1(7015,-910) ; v1(7245,-925) 7325,-1005 7325,-1280 P1.3
PB2: P1.4 u0.21 | length 4290.1
  Top Layer w10: u0.21 3907.48,-932.48 3935,-960 4015,-960 4125,-850 4465,-850 4540,-775 5430,-775 5520,-865 v1(6635,-865) ; v1(7035,-865) v1(7245,-865) ; P1.4 7325,-1380 7400,-1380 7435,-1345 7435,-1045 v1(7370,-980)
  Bottom Layer w10: v1(6635,-865) v1(7035,-865) ; v1(7245,-865) 7255,-865 v1(7370,-980)
PB3: P1.1 u0.22 | length 4344.2
  Top Layer w10: u0.22 3927.17,-917.17 3945,-935 4010,-935 4140,-805 4455,-805 4520,-740 5445,-740 5535,-830 v1(6680,-830) ; v1(7060,-830) 7225,-830 v1(7245,-810) ; P1.1 7430,-1430 7470,-1390 7470,-940 v1(7375,-845)
  Bottom Layer w10: v1(6680,-830) v1(7060,-830) ; v1(7245,-810) 7340,-810 v1(7375,-845)
RESET: C5.2 D1.A P1.5 R1.1 S.2 u0.30 | length 5698.9
  Top Layer w10: D1.A 2361.57,-555.43 R1.1 2575.43,-555.43 S.2 2880,-570 C5.2 ; C5.2@3019.94,-575 3030,-575 3100,-645 v1(3110,-645) ; v1(3770,-750) 3850,-750 3892.52,-707.48 u0.30 5462.48,-707.48 v1(5512.5,-757.5) ; v1(7220,-1180) 7220,-1255 7245,-1280 7325,-1280 P1.5
  Bottom Layer w10: v1(3110,-645) 3405,-645 3510,-750 v1(3770,-750) ; v1(5512.5,-757.5) 7067.5,-757.5 7100,-790 7100,-1060 v1(7220,-1180)
S1-0: S1.16 S11.0 | length 1092.6
  Top Layer w10: S1.16 5270,-1430 5350,-1350 5600,-1350 5645,-1305 5698.26,-1305 S11.0
S1-1: S1.15 S11.1 | length 813.2
  Bottom Layer w10: S1.15 5370,-1825 5310,-1765 5310,-1245 5357.53,-1197.47 S11.1
S1-2: S1.8 S11.2 | length 1304.1
  Top Layer w10: v1(5720,-1995) v1(5720,-1690)
  Bottom Layer w10: S11.2 5533.82,-1298.82 5620,-1385 5620,-1590 v1(5720,-1690) ; v1(5720,-1995) 5720,-2035 5760,-2075 5920,-2075 5970,-2125 S1.8
S1-3: S1.9 S11.3 | length 1060.5
  Top Layer w10: S11.3 5608.6,-1406.41 5665,-1350 5860,-1350 5970,-1460 S1.9
S1-4: S1.13 S11.4 | length 691.2
  Top Layer w10: S11.4 5420,-1545.56 5420,-1935 5460,-1975 5535,-1975 5570,-1940 S1.13
S1-5: S1.14 S11.5 | length 383.9
  Top Layer w10: S1.14 5470,-1641.86 S11.5
S1-6: S1.11 S11.6 | length 383.8
  Top Layer w10: S11.6 5770,-1641.38 S1.11
S1-7: S1.10 S11.7 | length 436
  Top Layer w10: S11.7 5870,-1595 S1.10
S1-8: S1.1 S11.8 | length 1211.6
  Top Layer w10: S1.1 5270,-2130 5325,-2075 5550,-2075 5620,-2005 5620,-1510 5723.97,-1406.04 S11.8
S1-9: S1.2 S11.9 | length 1960.2
  Top Layer w10: v1(5235,-1245) 5235,-1805 5185,-1855 5185,-2215 5230,-2260 5345,-2260 5370,-2235 S1.2
  Bottom Layer w10: v1(5235,-1245) 5330,-1150 5465,-1150 5613.43,-1298.43 S11.9
S1-A: S1.3 u0.35 | length 3684
  Top Layer w10: u0.35 5469.06,-609.06 5550,-690 v1(5550,-795) ; v1(5935,-1275) v1(5935,-1105)
  Bottom Layer w10: S1.3 5470,-1990 5520,-1940 5520,-1845 5560,-1805 5870,-1805 5935,-1740 v1(5935,-1275) ; v1(5550,-795) 5550,-825 5635,-910 5860,-910 5935,-985 v1(5935,-1105)
S1-B: S1.6 u0.36 | length 3871.5
  Top Layer w10: u0.36 5499.37,-589.37 5600,-690 v1(5600,-795) ; S1.6 5825,-2135 v1(5825,-2025)
  Bottom Layer w10: v1(5600,-795) 5600,-805 5675,-880 5945,-880 6305,-1240 6305,-1755 6095,-1965 5885,-1965 v1(5825,-2025)
S1-C: S1.7 u0.37 | length 3832.6
  Top Layer w10: u0.37 5524.69,-569.69 5670,-715 v1(5670,-795) ; S1.7 5925,-2135 v1(5925,-2025)
  Bottom Layer w10: v1(5670,-795) 5670,-810 5710,-850 5960,-850 6330,-1220 6330,-1760 6100,-1990 5960,-1990 v1(5925,-2025)
S1-D: S1.4 u0.38 | length 4289.7
  Top Layer w10: u0.38 5595,-550 5667.5,-622.5 6047.5,-622.5 v1(6225,-800) ; v1(6225,-1220) v1(6225,-1035)
  Bottom Layer w10: S1.4 5570,-1990 5620,-1940 5620,-1855 5645,-1830 6190,-1830 6280,-1740 6280,-1275 v1(6225,-1220) ; v1(6225,-1035) v1(6225,-800)
S2-0: S2.16 S22.0 | length 1092.6
  Top Layer w10: S2.16 6330,-1430 6410,-1350 6660,-1350 6705,-1305 6758.26,-1305 S22.0
S2-1: S2.15 S22.1 | length 777.8
  Bottom Layer w10: S2.15 6430,-1825 6395,-1790 6395,-1245 6442.53,-1197.47 S22.1
S2-2: S2.8 S22.2 | length 1298.3
  Top Layer w10: v1(6780,-2025) v1(6780,-1690)
  Bottom Layer w10: S22.2 6593.82,-1298.82 6780,-1485 v1(6780,-1690) ; v1(6780,-2025) 6830,-2075 6980,-2075 7030,-2125 S2.8
S2-3: S2.9 S22.3 | length 1060.5
  Top Layer w10: S22.3 6668.6,-1406.41 6725,-1350 6920,-1350 7030,-1460 S2.9
S2-4: S2.13 S22.4 | length 691.2
  Top Layer w10: S22.4 6480,-1545.56 6480,-1935 6520,-1975 6595,-1975 6630,-1940 S2.13
S2-5: S2.14 S22.5 | length 383.9
  Top Layer w10: S2.14 6530,-1641.86 S22.5
S2-6: S2.11 S22.6 | length 383.8
  Top Layer w10: S22.6 6830,-1641.38 S2.11
S2-7: S2.10 S22.7 | length 436
  Top Layer w10: S22.7 6930,-1595 S2.10
S2-8: S2.1 S22.8 | length 1211.6
  Top Layer w10: S2.1 6330,-2130 6385,-2075 6610,-2075 6680,-2005 6680,-1510 6783.97,-1406.04 S22.8
S2-9: S2.2 S22.9 | length 1690.8
  Bottom Layer w10: S2.2@6430,-2165 6265,-2000 6265,-1865 6355,-1775 6355,-1220 6425,-1150 6525,-1150 6673.43,-1298.43 S22.9
S2-A: S2.3 u0.39 | length 5272.7
  Top Layer w10: u0.39 5945,-530 6255,-220 6520,-220 6725,-425 7025,-425 7075,-475 7075,-730 6980,-825 v1(6980,-1090)
  Bottom Layer w10: S2.3 6530,-2030 6580,-1980 6580,-1855 6645,-1790 6795,-1790 6815,-1770 6815,-1715 6980,-1550 v1(6980,-1090)
S2-B: S2.6 u0.40 | length 5212
  Top Layer w10: u0.40 5905,-510 6240,-175 6530,-175 6715,-360 v1(6905,-360) ; S2.6 6830,-2075 6880,-2025 v1(6880,-1825) ; v1(7075,-1195) 7075,-1130 7145,-1060 v1(7145,-1055)
  Bottom Layer w10: v1(6880,-1825) 6880,-1745 7075,-1550 v1(7075,-1195) ; v1(6905,-360) 7070,-360 7145,-435 v1(7145,-1055)
S2-C: S2.7 u0.41 | length 5299
  Top Layer w10: u0.41 5860,-490 6215,-135 6930,-135 7210,-415 v1(7210,-765) ; S2.7 6930,-2075 6980,-2025 v1(6980,-1825) ; v1(7125,-1240) 7125,-1175 7210,-1090 v1(7210,-1035)
  Bottom Layer w10: v1(6980,-1825) 6980,-1715 7125,-1570 v1(7125,-1240) ; v1(7210,-1035) v1(7210,-765)
S2-D: S2.4 u0.42 | length 5688.2
  Top Layer w10: u0.42 5839,-471 6210,-100 6935,-100 7285,-450 7285,-955 7255,-985 7080,-985 7030,-1035 v1(7030,-1140)
  Bottom Layer w10: S2.4 6630,-2005 6680,-1955 6680,-1845 6710,-1815 6805,-1815 6850,-1770 6850,-1730 7030,-1550 v1(7030,-1140)
SCL: R3.1 u0.43 u3.5 | length 3804.8
  Top Layer w10: u0.43 4239,-451 v1(4270,-420)
  Bottom Layer w10: u3.5 1170,-175 4140,-175 4225,-260 4225,-375 R3.1@4359.94,-509.94
SDA: R4.1 u0.44 u3.4 | length 4078.7
  Top Layer w10: u0.44 4179,-431 v1(4260,-350)
  Bottom Layer w10: u3.4 980,-410 930,-360 930,-275 1055,-150 4145,-150 4260,-265 v1(4260,-350) R4.1@4385,-350
V-OUT160: R5.1 R6.1 R7.1 R8.1 R9.1 R10.1 R11.1 R12.1 u2.2 | length 9047.4
  Top Layer w30: R5.1 350,-1285 655,-980 985,-980 1145,-1140 1350,-1140 R6.1@1350,-1284.94 ; 2030,-980 2119.94,-890.07 R7.1 ; R11.1 2349.94,-1130.07 2350,-1130 ; 2749.94,-1130.07 2750,-1130 ; R8.1 3749.94,-1120.07 3755,-1115 3755,-1110 ; R12.1 4749.94,-1129.94 4750,-1129.87 ; R9.1 5429.94,-889.94 5500,-960 ; R10.1 6149.94,-980.07
  Top Layer w40: 1350,-1140 1565,-1140 1725,-980 2030,-980 2180,-1130 2350,-1130 2750,-1130 2930,-1130 3080,-980 3360,-980 3490,-1110 3755,-1110 3995,-1110 4130,-975 4420,-975 4570,-1125 5335,-1125 5490,-970 6720,-970 6890,-800 6890,-505 u2.2@6900,-495
VCC5V: C2.2 C3.2 C4.2 D1.C H1.5 H2.5 M1.5 M2.5 P1.2 P2.3 R1.2 R3.2 R4.2 S1.5 S2.5 u0.10 u0.31 u0.61 u0.80 u0.100 u1.1 u3.1 | length 23781.2
  Top Layer w10: 870,-2380 H1.5 ; v2(970,-120) 820,-270 820,-635 895,-710 u3.1 ; v1@1405.06,-90 C2.2 1545.07,-450 C3.2 C4.2 1720.06,-374.94 1845,-250 3045,-250 3187,-392 u0.80 3723,-392 3789.37,-325.63 u0.61 ; 1930,-2380 H2.5 ; v1(2230,-420) 2346.93,-420 D1.C 2473.5,-428.07 R1.2 ; 3270,-2380 M1.5 ; u0.100 3688.78,-786.22 3690,-785 ; u0.10 3690,-785 ; 3720,-580 3827.8,-687.8 u0.31 ; 3720,-395 3720,-700 3690,-730 3690,-785 ; 4330,-2380 M2.5 ; 5670,-2380 S1.5 ; 6715,-2380 7085,-2380 7145,-2320 7145,-2095 7425,-1815 7425,-1645 7275,-1495 P1.2 ; 6730,-2380 S2.5
  Top Layer w20: v2(475,-2365) 490,-2380 6730,-2380 ; v2(4335,-90) 4360,-90 4585,-315 v1(4625,-315) 5490,-315 v4(5535,-360)
  Bottom Layer w10: v1(2140,-250) 2140,-330 v1(2230,-420) ; R4.2@4475,-355 4475,-510 4565,-510 4625,-450 v1(4625,-315)
  Bottom Layer w20: v2(475,-2365) 370,-2260 370,-2140 80,-1850 80,-610 570,-120 v2(970,-120) 1000,-90 v2(4335,-90)
  Bottom Layer w40: u1.1 5355,-415 5410,-360 v4(5535,-360) 6150,-360 6340,-550
  other v1: 1405,-90
XTAL1: C7.2 R2.1 u0.34 Y1.1 | length 2661.1
  Top Layer w10: u0.34 5438.74,-628.74 v1(5465,-655) ; v1(5750,-425) v1(5750,-180) ; v1(5835,-140) Y1.1
  Bottom Layer w10: v1(5465,-655) 5650,-655 5750,-555 v1(5750,-425) ; v1(5750,-180) 5755,-180 5795,-140 ; R2.1@5750,-95 5795,-140 ; C7.2@6060,-135.06 6009.94,-85 5890,-85 v1(5835,-140) 5795,-140
XTAL2: C6.2 R2.2 u0.33 Y1.2 | length 2600.6
  Top Layer w10: u0.33 4245,-648.43 4250.32,-653.75 v1(5385,-653.75) ; Y1.2 v1(5580,-140) ; v1(5675,-425) v1(5675,-180)
  Bottom Layer w10: C6.2 5370.06,-139.94 5425,-85 5525,-85 v1(5580,-140) 5635,-140 ; v1(5385,-653.75) 5416.25,-653.75 5455,-615 5635,-615 5675,-575 v1(5675,-425) ; v1(5675,-180) 5635,-140 ; R2.2@5680,-95 5635,-140
pads on no net: H11.L0 H11.R0 H22.L0 H22.R0 M11.L0 M11.R0 M22.L0 M22.R0 P2.2 S11.L0 S11.R0 S22.L0 S22.R0 u0.1 u0.2 u0.3 u0.4 u0.5 u0.6 u0.7 u0.8 u0.9 u0.12 u0.13 u0.14 u0.15 u0.16 u0.17 u0.18 u0.19 u0.23 u0.24 u0.25 u0.26 u0.27 u0.28 u0.29 u0.45 u0.46 u0.47 u0.48 u0.49 u0.50 u0.51 u0.52 u0.63 u0.64 u0.65 u0.66 u0.67 u0.68 u0.69 u0.70 u0.79 u0.82 u0.83 u0.84 u0.85 u0.86 u0.87 u0.88 u0.89 u2.4 u2.5 u3.3
copper on no net:
  other v3: 175,-2250 7325,-2250 175,-175 7325,-175

## Polygon pours and split planes (outlines as drawn)
GND on Bottom Layer "Top Layer-No Net" (solid, remove dead copper, pour order 53): -215,-2595 7730,-2595 7835,-2490 7750,-2405 7750,400 40,400 -220,140
GND on Top Layer "Top Layer-No Net" (solid, remove dead copper, pour order 55): -205,-2585 -155,-2635 7685,-2635 7685,260 7805,380 7625,200 -205,200

## Keep-outs
Keep-Out Layer:
  lines w10: -21.85,-175 cw(c175,-175) 175,21.85 7325,21.85 ; -21.85,-175 -21.85,-175 ; -21.85,-175 -21.85,-2250 ccw(c175,-2250) 175,-2446.85 ; 175,-2446.85 175,-2446.85 ; 175,-2446.85 7325,-2446.85 ccw(c7325,-2250) 7521.85,-2250 7521.85,-175 ccw(c7325,-175) 7325,21.85 ; 7325,21.85 7325,21.85

## Silkscreen, mask and mechanical layers (free items; w line width, h text height)
Top Overlay:
  drawing of 2867 lines, arcs and shapes, not listed
  text "ON" at 6815,-20 h60 r180
  text "ON" at 7055,-25 h60 r180
  text "→" at 6795,-110 h60 r180
  text "→" at 6980,-135 h60
  text "DATE: 2019.1.17" at 80,-535 h60
  text "VERSION: NO.2" at 80,-680 h60
  text "NANJING" at 85,-815 h60
Bottom Overlay:
  lines w10: 6605,-435 6235,-435 6210,-435 ; 6210,-435 6210,-15 6610,-15 6610,-600 6540,-600 6210,-600 6210,-435

## Text inside footprints (layer, text, board x,y; h text height)
P1: Top Overlay "6" at 7295,-1170 h50 r90; Top Overlay "5" at 7395,-1170 h50 r90; Top Overlay "2" at 7295,-1530 h50 r90; Top Overlay "1" at 7395,-1510 h50 r90
u0: Mechanical 16 "TQFP 100" at 3847.64,-660.63 h49.6 r90; Mechanical 16 "R" at 3792.13,-416 h37.2 r90